# Altium PCB UpperAvi_3.PcbDoc
Units mil, origin at the board's own origin, x right, y up, seen from the top; angles counter-clockwise.
Board outline 3389.2 x 4067.17 mil, 4 copper layers (Top Layer, Signal Layer 1, Signal Layer 2, Bottom Layer), stack 30.634 mil thick; 20 components, 7 nets, 59 pads, 6 vias.
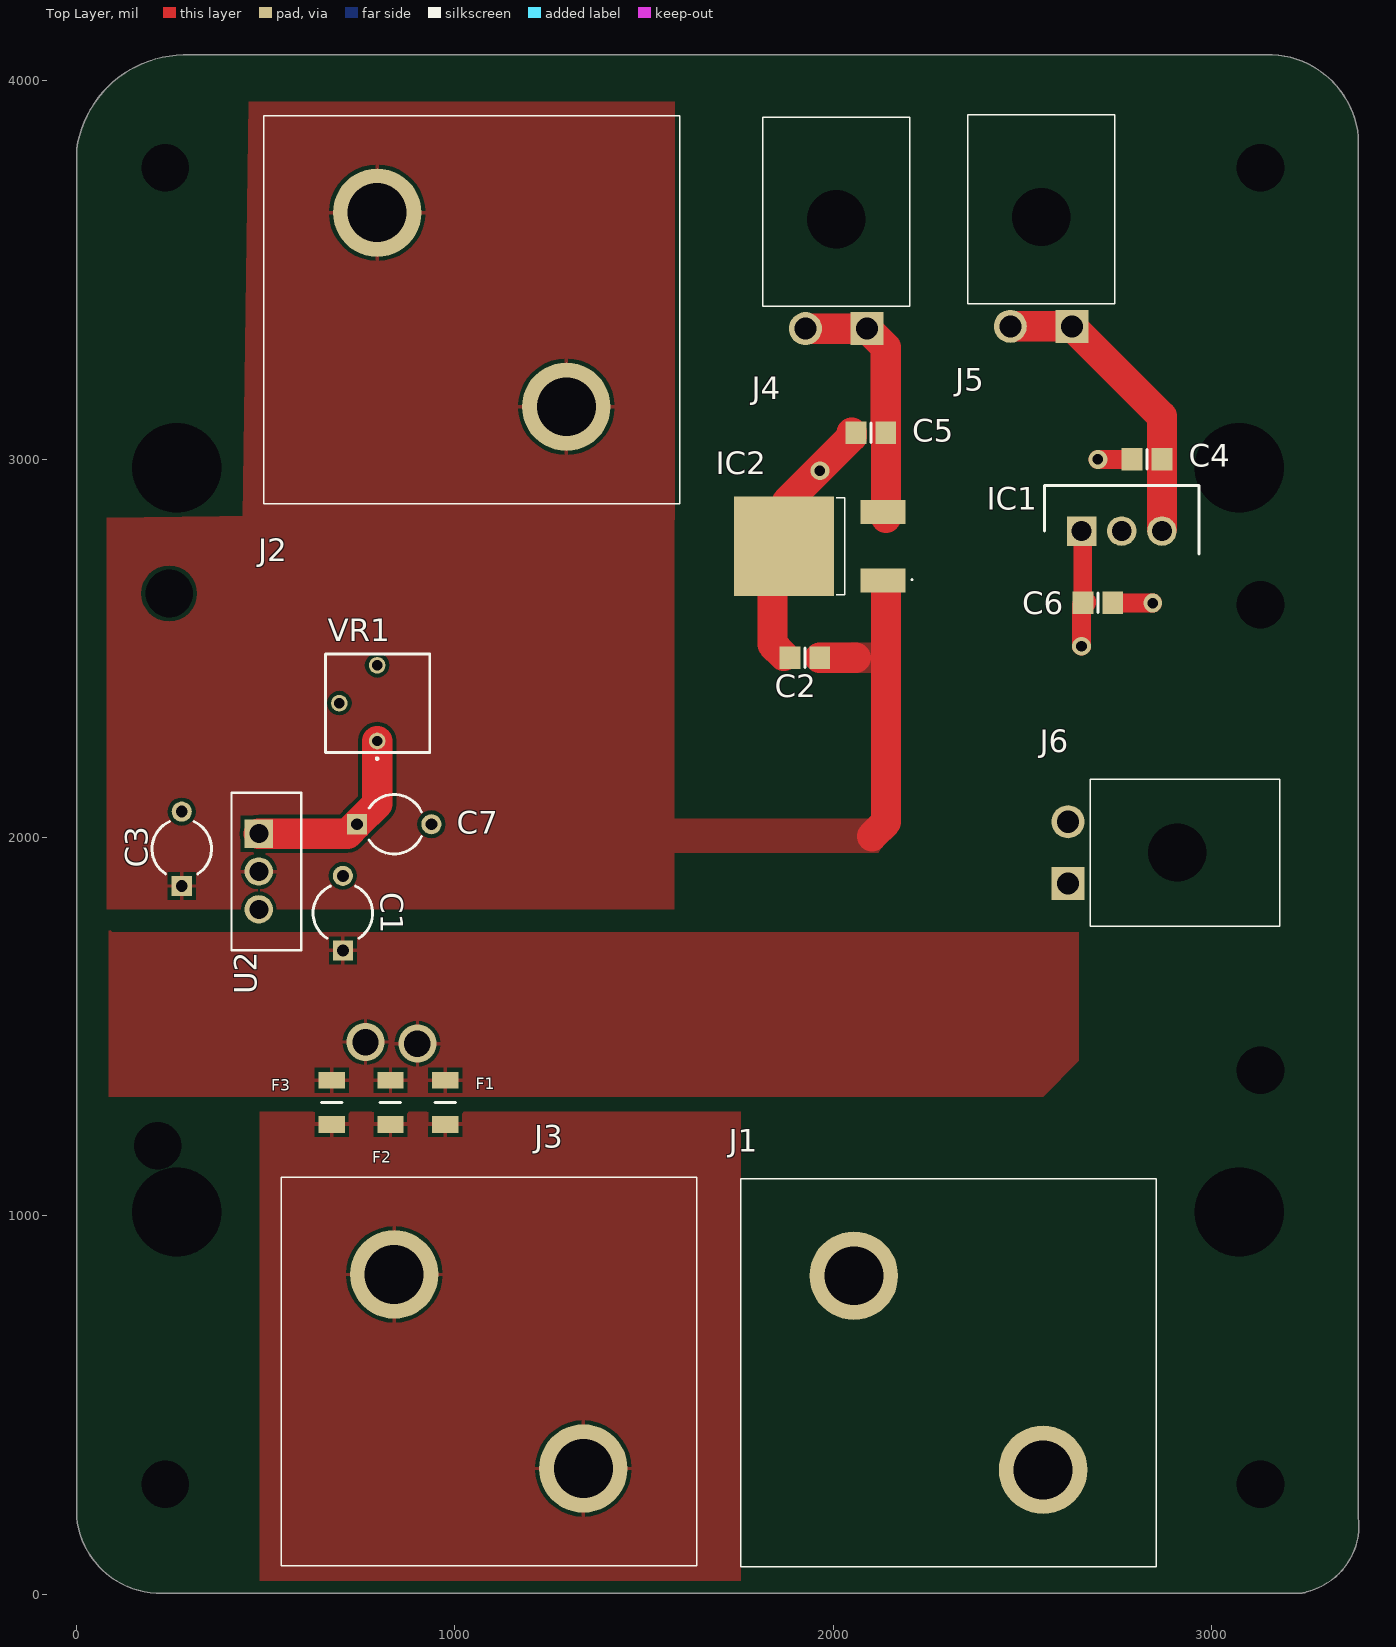
[diagram p0: Top Layer view]
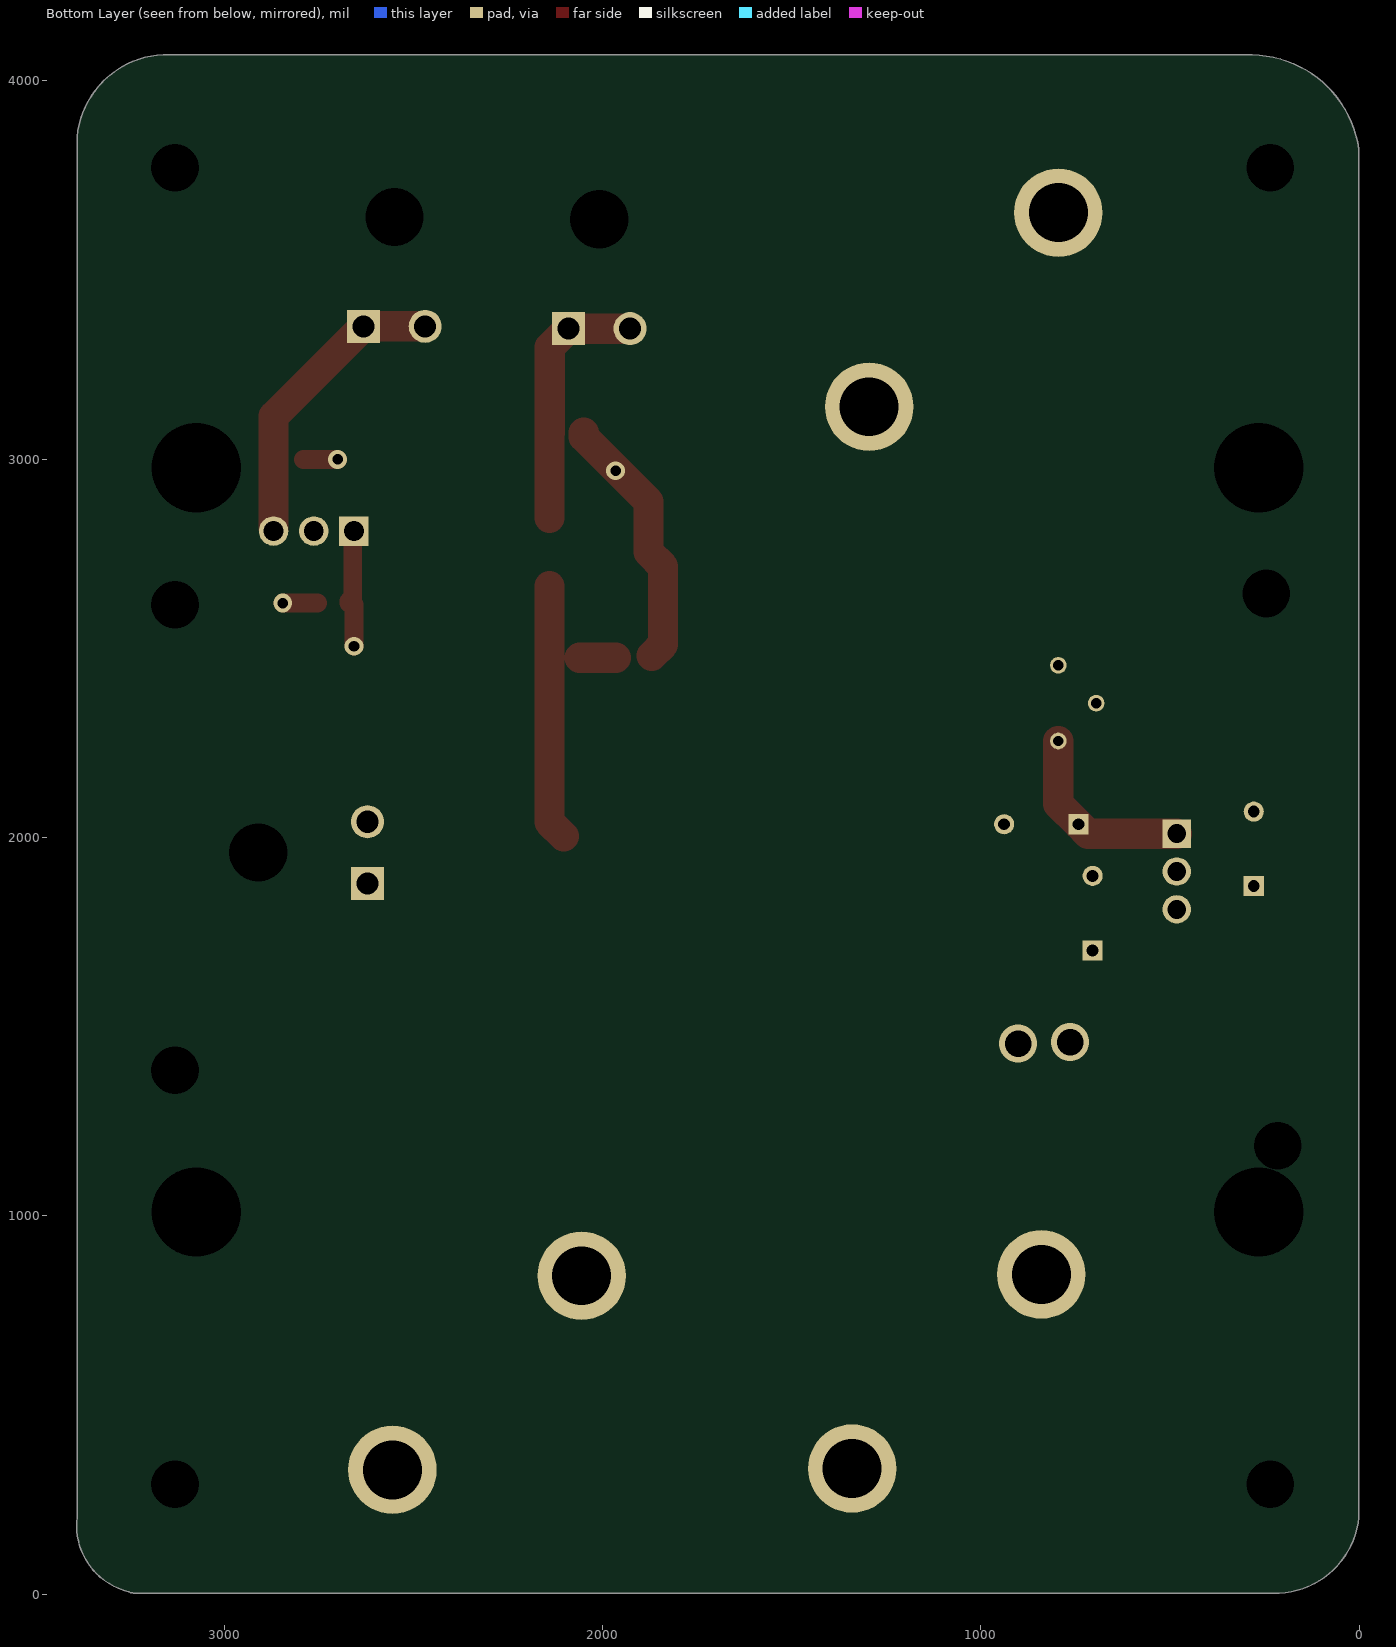
[diagram p1: Bottom Layer view, seen from below]
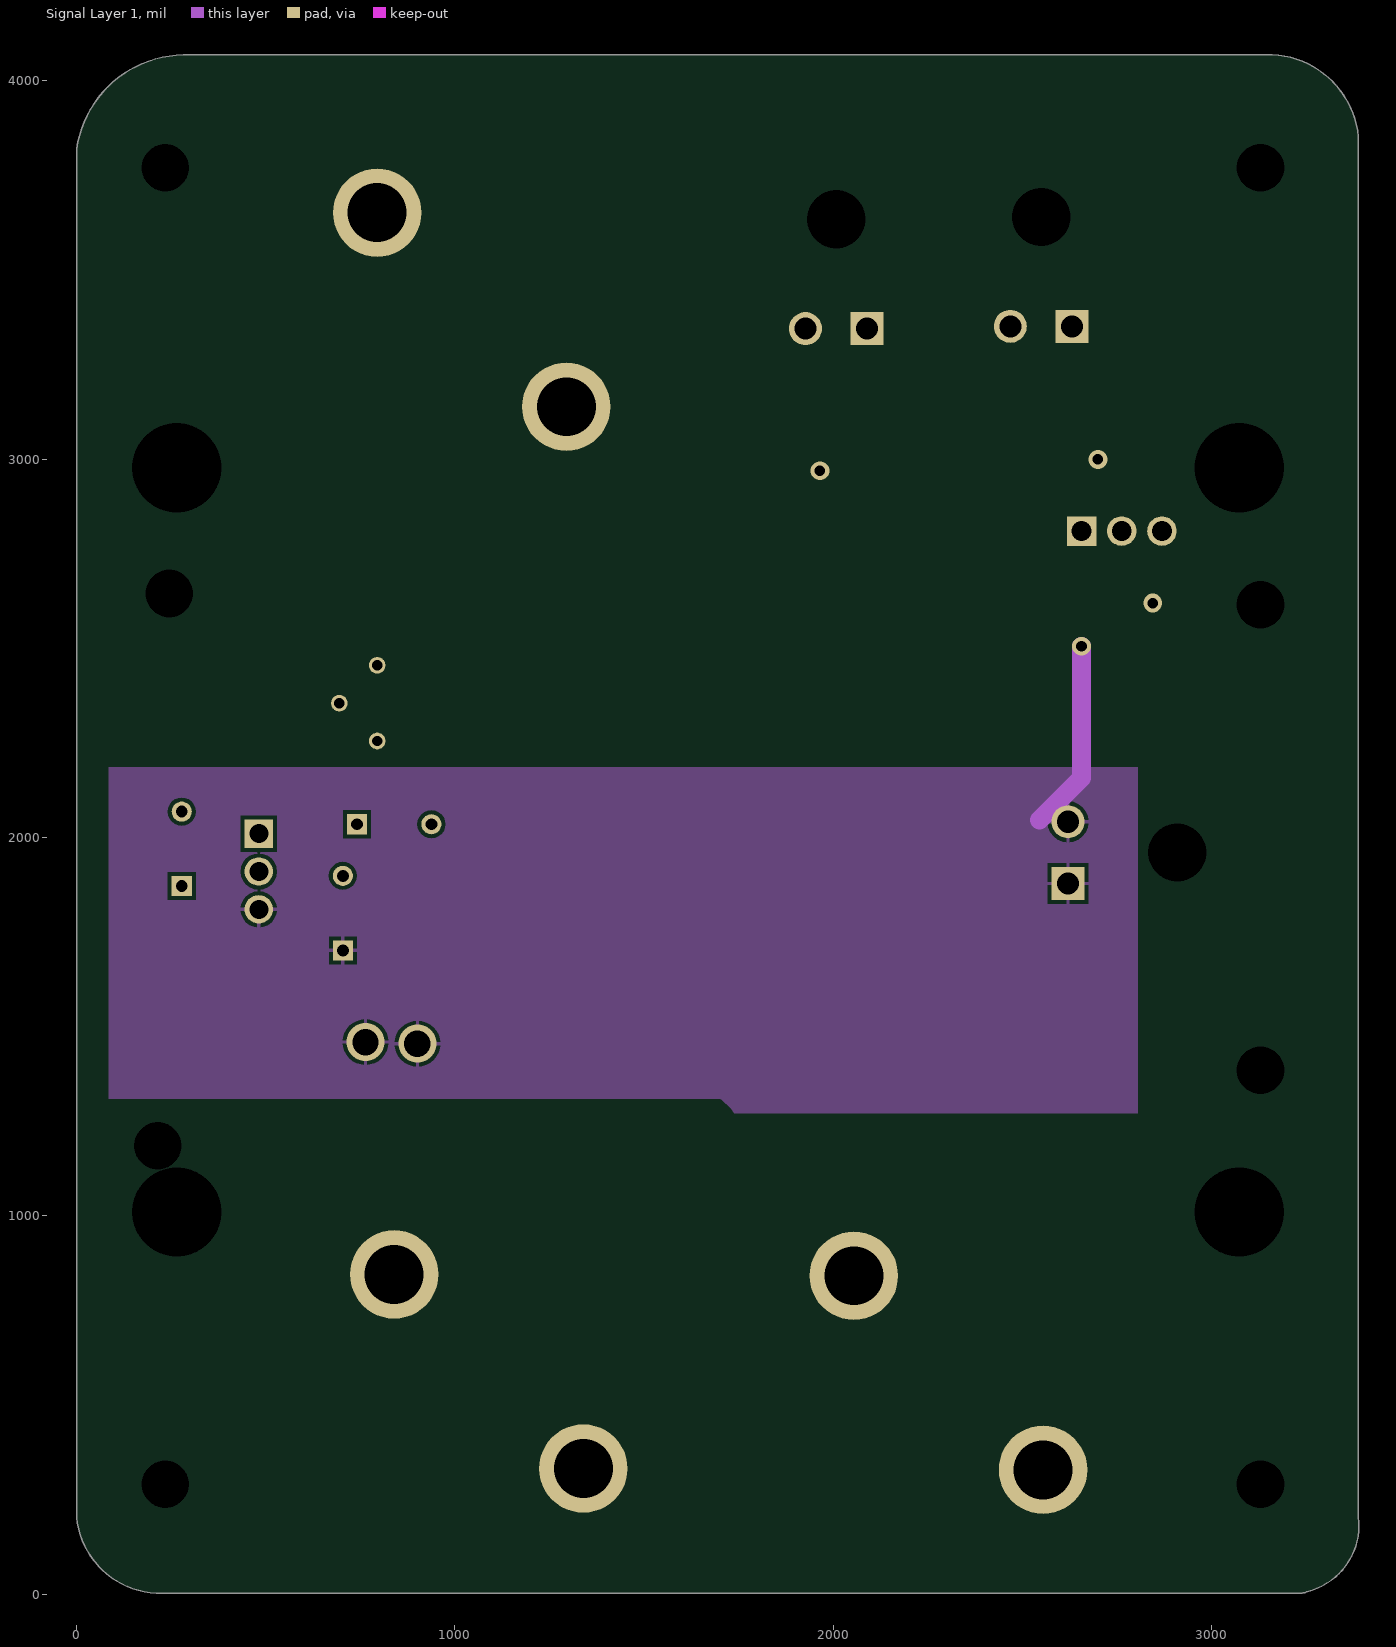
[diagram p2: Signal Layer 1]
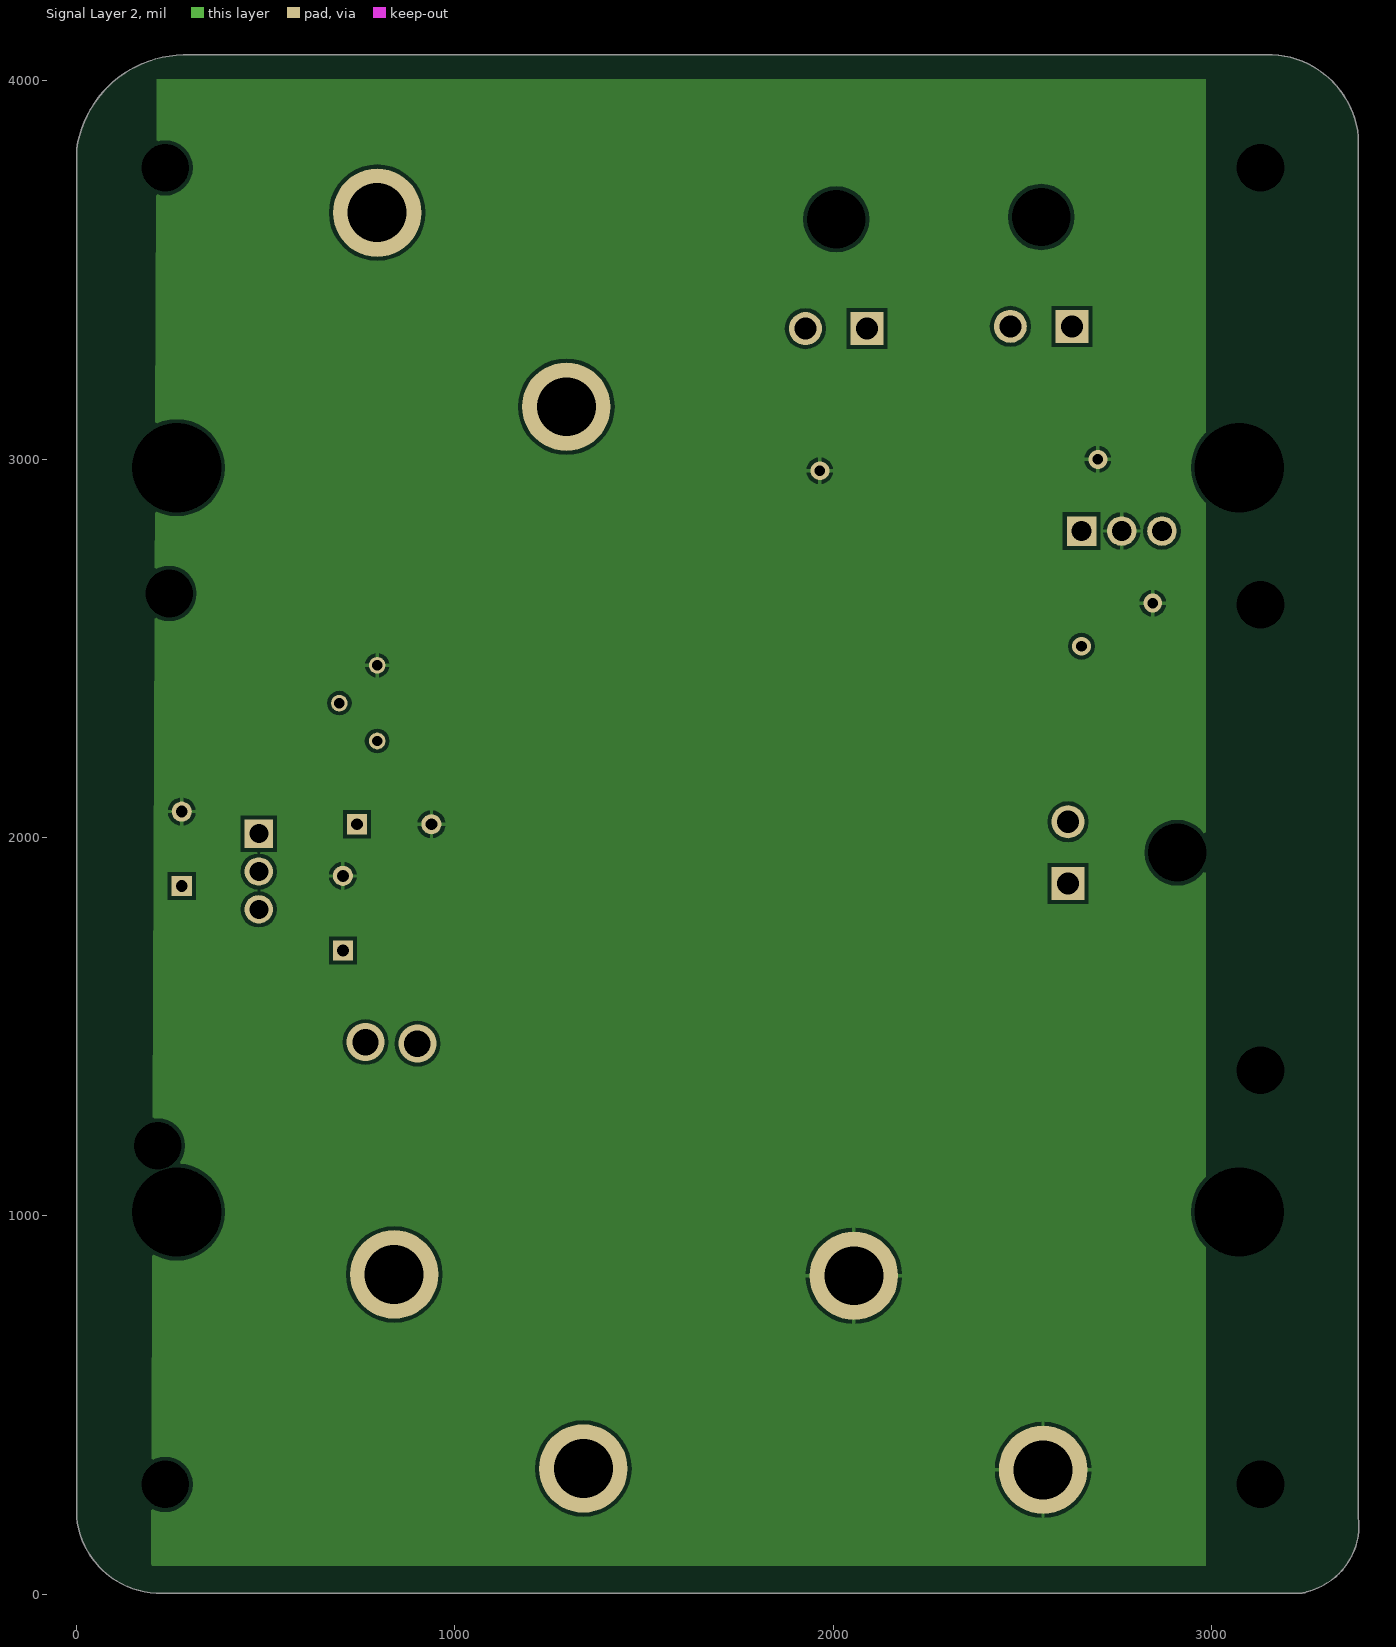
[diagram p3: Signal Layer 2]

## Layer stack, top to bottom
Top Solder: solder mask 0.4, Solder Resist, Dk 3.5
Top Layer: signal copper 1.4
Dielectric 1: core 10, FR-4, Dk 4.2
Signal Layer 1: signal copper 1.417
Dielectric 4: core 10, Dk 4.2
Signal Layer 2: signal copper 1.417
Dielectric 5: prepreg 5, Dk 4.2
Bottom Layer: signal copper 1.4
Bottom Solder: solder mask 0.4, Solder Resist, Dk 3.5

## Board outline
0.74,203.47 cw(c24.27,205.73) 0.63,205.73 0.63,3816.62 cw(c24.27,3816.62) 0.87,3819.96 cw(c287.51,3779.02) 300.71,4068.27 3128.55,4068.27 cw(c3150,3829.63) 3388.53,3852.23 cw(c3365,3850) 3388.64,3850 3388.64,201.42 cw(c3210.76,180.76) 3389.83,180.76 cw(c3210.76,180.76) 3252.93,6.72 cw(c3240.01,26.52) 3240.01,2.88 242.61,2.88 cw(c222.5,224.75)

## Design rules (kind name [scope] priority, off if disabled: settings)
Clearance [All] p1: gap=10 ignorepadtopadclearanceinfootprint=FALSE except(0: Arc-Hole Track-Hole SMDPad-Hole THPad-Hole Via-Hole Fill-Hole Poly-Hole Region-Hole Text-Hole)
PolygonConnect PolygonConnect_1 [All vs IsNamedPolygon('Top Layer-5VOUT') Or  IsNamedPolygon('Bottom Layer-No Net')] p1: thpad.connectstyle=Relief thpad.reliefconductorwidth=10 thpad.reliefentries=4 thpad.polygonreliefangle="90 Angle" thpad.airgapwidth=10 smdpad.connectstyle=Direct smdpad.reliefconductorwidth=10 smdpad.reliefentries=4 smdpad.polygonreliefangle="90 Angle" smdpad.airgapwidth=10 via.connectstyle=Relief via.reliefconductorwidth=10 via.reliefentries=4 via.polygonreliefangle="90 Angle" via.airgapwidth=10
PolygonConnect [All] p2: connectstyle=Relief reliefconductorwidth=10 reliefentries=4 polygonreliefangle="90 Angle" airgapwidth=10
RoutingVias [All] p1: holewidth=28 width=50 viastyle="Through Hole" minholewidth=28 minwidth=50 maxholewidth=28 maxwidth=50
SMDToPlane [All] p1: distance=0
SolderMaskExpansion [All] p1: expansion=4
Width [All] p1: maxlimit=100 minlimit=10 preferedwidth=10 minimp=50.000000 maximp=50.000000 favimp=50.000000
30 further rules are at their usual default settings.

## Components (designator, comment, footprint, x,y, rotation, side; value= is the part's Value field where it differs from the comment)
C1 "Cap Pol3" CAPR5-4X5 704.34,1800 r90 top value=10uF
C2 ".1uF" 6-0805_M 1925.63,2475 r180 top
C3 "Cap Pol3" CAPR5-4X5 278.42,1970 r90 top value=100uF
C4 ".1uF" 6-0805_M 2830,2999.37 r180 top
C5 "2.2uF" 6-0805_M 2100,3070 r180 top
C6 ".33uF" 6-0805_M 2700,2620 r0 top
C7 "Cap Pol3" CAPR5-4X5 840,2035 r0 top value=10uF
F1 "0501010.WRA" FUSC3216X98N 975,1300 r90 top
F2 "0501010.WRA" FUSC3216X98N 830,1300 r90 top
F3 "0501010.WRA" FUSC3216X98N 675,1300 r90 top
IC1 "L78S12CV-12" TO270P460X1020X2008-3P 2656.77,2810 r0 top
IC2 "LF33CDT-TRY" LD1117DT33 2000.91,2770 r0 top
J1 "038660-8802" 0386608802 2305,585 r0 top
J2 "038660-8802" 0386608802 1045,3395 r0 top
J3 "038660-8802" 0386608802 1090,588.5 r0 top
J4 "1-770966-1" 17709661 2090,3345 r180 top
J5 "1-770966-1" 17709661 2631.5,3351.02 r180 top
J6 "1-770966-1" 17709661 2621.02,1878.5 r90 top
U2 "LM1084IT-5.0" *TO254P470X1016X2222-3P 522.09,1810 r270 top
VR1 "3362P-1-102ALF" 3362P_1 933.98,2355 r90 top

## Footprints (in the part's own frame and the unit in brackets; to place one, negate y for a bottom-side part, rotate by r counter-clockwise, add the part's x,y. Pads: shape width x height; smd on the part's side, far side on the other; paste and mask are expansions set on the pad)
6-0805_M [mm] "Chip Resistor, Body 2.0x1.2mm, IPC Low Density"
  rect 1.4x1.5 smd: 1(-1,0) 2(1,0)
  silkscreen extent 0,-0.65 0,0.65, body extent -1.07,-0.7 1.07,0.7, height 0.7
3362P_1 [mm]
  round 1.12 hole 0.69: 1(-2.54,3.53) 2(0,6.07) 3(2.54,3.53)
  silkscreen extent -3.78,0 3.3,6.99
17709661 [mm]
  rect 2.22x2.22 hole 1.48: 1(0,0)
  round 2.22 hole 1.48: 2(4.14,0)
  round 1.955 hole 3.91 unplated: 3(2.07,-7.34)
  silkscreen extent -2.86,-14.2 7,-1.5
0386608802 [mm]
  round 5.94 hole 3.96: 1(-6.35,6.515) 2(6.35,-6.515)
  silkscreen extent -13.95,-13.03 13.95,13.03, body extent -13.95,-13.03 13.95,13.03, height 21
*TO254P470X1016X2222-3P [mil]
  rect 75x75 hole 50: 1(-200,-40)
  round 75 hole 50: 2(-100,-40) 3(0,-40)
  silkscreen extent -308,-112 108,72
CAPR5-4X5 [mm] "Capacitor; 2 Leads"
  rect 1.35x1.35 hole 0.8: 1(-2.5,0)
  round 1.35 hole 0.8: 2(2.5,0)
  silkscreen extent -1.69,-2 1.82,2
FUSC3216X98N [mm]
  rect 1.14x1.75 smd: 1(-1.48,0) 2(1.48,0)
  silkscreen extent 0,-0.69 0,0.69, body extent -1.6,-0.79 1.6,0.79, height 0.98
LD1117DT33 [mm]
  rect 3x1.6 smd: 1(3.325,-2.3) 2(3.325,2.3)
  rect 6.7x6.7 smd: 3(-3.325,0)
  silkscreen extent 0.18,-3.25 5.32,3.25
TO270P460X1020X2008-3P [mm]
  rect 1.98x1.98 hole 1.32: 1(0,0)
  round 1.98 hole 1.32: 2(2.7,0) 3(5.4,0)
  silkscreen extent -2.5,-1.53 7.9,3.07, body extent -2.4,-1.53 7.8,3.07, height 19.21

## Part data
C1 C3 C7: "Polarized Capacitor (Surface Mount)", LatestRevisionDate=29-May-2009, LatestRevisionNote="IPC-7351 Footprint Added.", PackageDescription="Chip Capacitor", PackageReference=C0805, Published=8-Jun-2000, Publisher="Altium Limited"
C2 C4 C5 C6: library part CC0603KRX7R9BB104, "0603 0.1 uF 50 V ±10 % Tolerance X7R SMT Multilayer Ceramic Capacitor", Package="0603 Yageo", Availability=Unavailable, MF=Yageo, MP=CC0603KRX7R9BB104, Price=None, SnapEDA_Link=https://www.snapeda.com/parts/CC0603KRX7R9BB104/Yageo/view-part/?ref=snap
F1 F2 F3: "Fuse", Manufacturer_Name=LITTELFUSE, Mouser Part Number=576-0501010.WRA, Datasheet Link=https://www.littelfuse.com/~/media/electronics/datasheets/fuses/littelfuse_fuse_501_datasheet.pdf.pdf, Height=0.985mm, Manufacturer_Part_Number=0501010.WRA, Mouser Price/Stock=https://www.mouser.com/Search/Refine.aspx?Keyword=576-0501010.WRA
IC1: library part L78S12CV, "Integrated Circuit", Manufacturer_Name=STMicroelectronics, Mouser Part Number=511-L78S12CV, Datasheet Link=https://componentsearchengine.com/Datasheets/1/L78S12CV.pdf, Height=4.6mm, Manufacturer_Part_Number=L78S12CV, Mouser Price/Stock=https://www.mouser.com/Search/Refine.aspx?Keyword=511-L78S12CV
IC2: "Integrated Circuit", Manufacturer_Name=STMicroelectronics, Mouser Part Number=511-LF33CDT-TRY, Datasheet Link=https://componentsearchengine.com/Datasheets/1/LF33CDT-TRY.pdf, Height=2mm, Manufacturer_Part_Number=LF33CDT-TRY, Mouser Price/Stock=https://www.mouser.com/Search/Refine.aspx?Keyword=511-LF33CDT-TRY
J1 J2 J3: "Connector", Manufacturer_Name=Molex, Datasheet Link=https://www.molex.com/pdm_docs/sd/386608802_sd.pdf, Height=21mm, Manufacturer_Part_Number=038660-8802
J4 J5 J6: "Connector", Manufacturer_Name="TE Connectivity", Mouser Part Number=571-1-770966-1, RS Part Number=7099906, Allied_Number=70084920, Allied Price/Stock=https://www.alliedelec.com/teconnectivity-1-770966-1/70084920/, Datasheet Link=https://www.te.com/commerce/DocumentDelivery/DDEController?Action=showdoc&DocId=Customer+Drawing%7F770966%7FG1%7Fpdf%7FEnglish%7FENG_CD_770966_G1.pdf%7F1-770966-1, Height=7.77mm, Manufacturer_Part_Number=1-770966-1, Mouser Price/Stock=https://www.mouser.com/Search/Refine.aspx?Keyword=571-1-770966-1, RS Price/Stock=https://uk.rs-online.com/web/p/products/7099906
U2: "Voltage stabiliser; LDO, fixed; 5V; 5A; TO220; THT; 1.2", Package="TO-220 Texas Instruments", Availability=Unavailable, MF="Texas Instruments", MP=LM1084IT-5.0/NOPB, Price=None, SnapEDA_Link=https://www.snapeda.com/parts/LM1084IT-5.0/NOPB/Texas%20Instruments/view-part/?ref=snap
VR1: "Variable Resistor", Manufacturer_Name=Bourns, Mouser Part Number=652-3362P-1-102ALF, Datasheet Link=https://componentsearchengine.com/Datasheets/1/3362P-1-102ALF.pdf, Manufacturer_Part_Number=3362P-1-102ALF, Mouser Price/Stock=https://www.mouser.com/Search/Refine.aspx?Keyword=652-3362P-1-102ALF

## Free pads (board coordinates)
  round 75 hole 125.98: 1(215,1185) 1(235,290) 1(235,3770) 1(245,2645) 1(3130,290) 1(3130,1385) 1(3130,2615) 1(3130,3770)
  round 75 hole 236.22: 1(265,1010) 1(265,2977.32) 1(3073.66,1010) 1(3073.66,2977.32)

## Via types
v1: diameter 50, hole 28, Top Layer to Bottom Layer, 4 vias
v2: diameter 100, hole 70, Top Layer to Bottom Layer, 2 vias

## Nets (pads, with @x,y where several pads share a name; then routed paths per layer and width w, separated by ;. In a path a pad name is that pad's centre, name@x,y a point inside that pad or via, vN(x,y) a via of type N, cw(c..) or ccw(c..) an arc to the next point about the centre after c; other vN are vias at no path point)
3.3VOUT: C5.1 IC2.2 J4.1 J4.2 | length 683.7
  Top Layer w80: J4.2 J4.1 2139.37,3295.63 C5.1 2140,3069.37 IC2.2@2140,2845
5VOUT: C2.1 C3.1 IC2.1 J2.1 J2.2 U2.2 | length 771
  Top Layer w80: C2.1 2060,2475 ; 2102.65,2003.39 2140,2040.74 IC2.1@2140,2663.9
12VOUT: C4.1 IC1.3 J5.1 J5.2 | length 794.9
  Top Layer w80: J5.2 J5.1 2869.37,3113.15 C4.1 IC1.3@2869.37,2817.6
24VIN: F1.1 F2.1 F3.1 J3.1 J3.2
GND: C1.2 C2.2 C3.2 C4.2 C5.2 C6.2 C7.2 IC1.2 IC2.3 J1.1 J1.2 VR1.3 | length 871
  Top Layer w50: v1(2700,2999.37) C4.2 ; C6.2@2753.74,2619.37 v1(2845,2619.37)
  Top Layer w80: C2.2@1870,2480 1840,2510 1840,2716.26 1878.19,2754.45 1878.19,2887.56 2049.37,3058.74 C5.2@2049.37,3070
  other v1: 1965,2969.37
NetC7_1: C7.1 U2.1 VR1.1 | length 512
  Top Layer w80: U2.1 716.57,2010 C7.1 795,2088.43 VR1.1
OUT24V: C1.1 C6.1 F1.2 F2.2 F3.2 IC1.1 J6.1 J6.2 U2.3 | length 826.9
  Top Layer w10: IC1.1@2660,2794.37 IC1.1@2670,2804.37
  Top Layer w50: v1(2656.77,2505.39) 2656.77,2616.14 C6.1 ; IC1.1@2660,2794.37 2660,2634.37 2670,2624.37 2670,2620 C6.1@2660.63,2610.63
  Signal Layer 1 w50: 2546.02,2046.5 2656.77,2157.24 v1(2656.77,2505.39)
  other v2: 901.49,1455.03 764.14,1459.1
pads on no net: J4.3 J5.3 J6.3 VR1.2

## Polygon pours and split planes (outlines as drawn)
no net on Bottom Layer "Bottom Layer-No Net" (solid, pour order 36): 525,130
OUT24V on Signal Layer 1 "Signal Layer 1-OUT24V" (solid, pour order 51): 85,1309.94 1700.05,1309.94 1706.41,1307.3 1731.41,1282.3 1733.4,1279.29 1739.05,1270.94 2805,1270.94 2805,2185.94 85,2185.94
no net on Signal Layer 1 "Signal Layer 1-No Net" (solid, pour order 40): 370,40
no net on Signal Layer 1 "Signal Layer 1-No Net 1" (solid, pour order 39): 350,4025
GND on Signal Layer 2 "Signal Layer 2-GND" (solid, pour order 41): 212.42,4004.37 2985,4004.37 2985,74.96 197.58,74.96
5VOUT on Top Layer "Top Layer-5VOUT 3" (solid, pour order 63): 2050,2515 2050,2435 2125,2435 2140,2450 2139.37,2450.63 2139.37,2504.37 2150,2515
OUT24V on Top Layer "Top Layer-OUT24V" (solid, pour order 61): 85,1760 95,1750 2650,1750 2650,1410 2555,1315 2425,1315 85,1315
5VOUT on Top Layer "Top Layer-5VOUT" (solid, pour order 59): 80,2844.91 80,1810 1580,1810 1580,2865.27
5VOUT on Top Layer "Top Layer-5VOUT 2" (solid, pour order 57): 2176.57,2050 2120,1960 1555,1960 cw(c1567.07,1972.07) 1550,1972.07 1550,2050
no net on Top Layer "Top Layer-No Net" (solid, pour order 55): 910.76,2140
24VIN on Top Layer "Top Layer-5VOUT 5" (solid, pour order 53): 1756.5,1275 1756.5,35 485,35 485,1275
5VOUT on Top Layer "Top Layer-5VOUT 1" (solid, pour order 44): 440,2840 1581,2840 1581,3945 455,3945
5VOUT on Top Layer "Top Layer-5VOUT 4" (solid, pour order 43): 1599,3945 1581,3945 1581,2840 455,2840 455,3945

## Other copper
Signal Layer 1:
  pour cut-out: 400,1150
  pour cut-out: 425,1145

## Silkscreen, mask and mechanical layers (free items; w line width, h text height)
Mechanical 13:
  lines w47.24: 3230,26.52 ccw(c3210.76,180.76) 3365,200 3365,3850 ccw(c3150,3829.63) 3129.63,4044.63 300.16,4044.63 ccw(c287.51,3779.02) 24.27,3816.62 24.27,205.73 ccw(c222.5,224.75) 241.52,26.52 3240.01,26.52